# Altium PCB Copy of PDC.PcbDoc (part 2 of 2)
Units mm, origin at the board's own origin, x right, y up, seen from the top; angles counter-clockwise.
Board outline 131.87 x 127.02 mm, 2 copper layers (Top Layer, Bottom Layer); 172 components, 174 nets, 834 pads, 15 vias.
Unrouted connection lines stored in the file: 429.
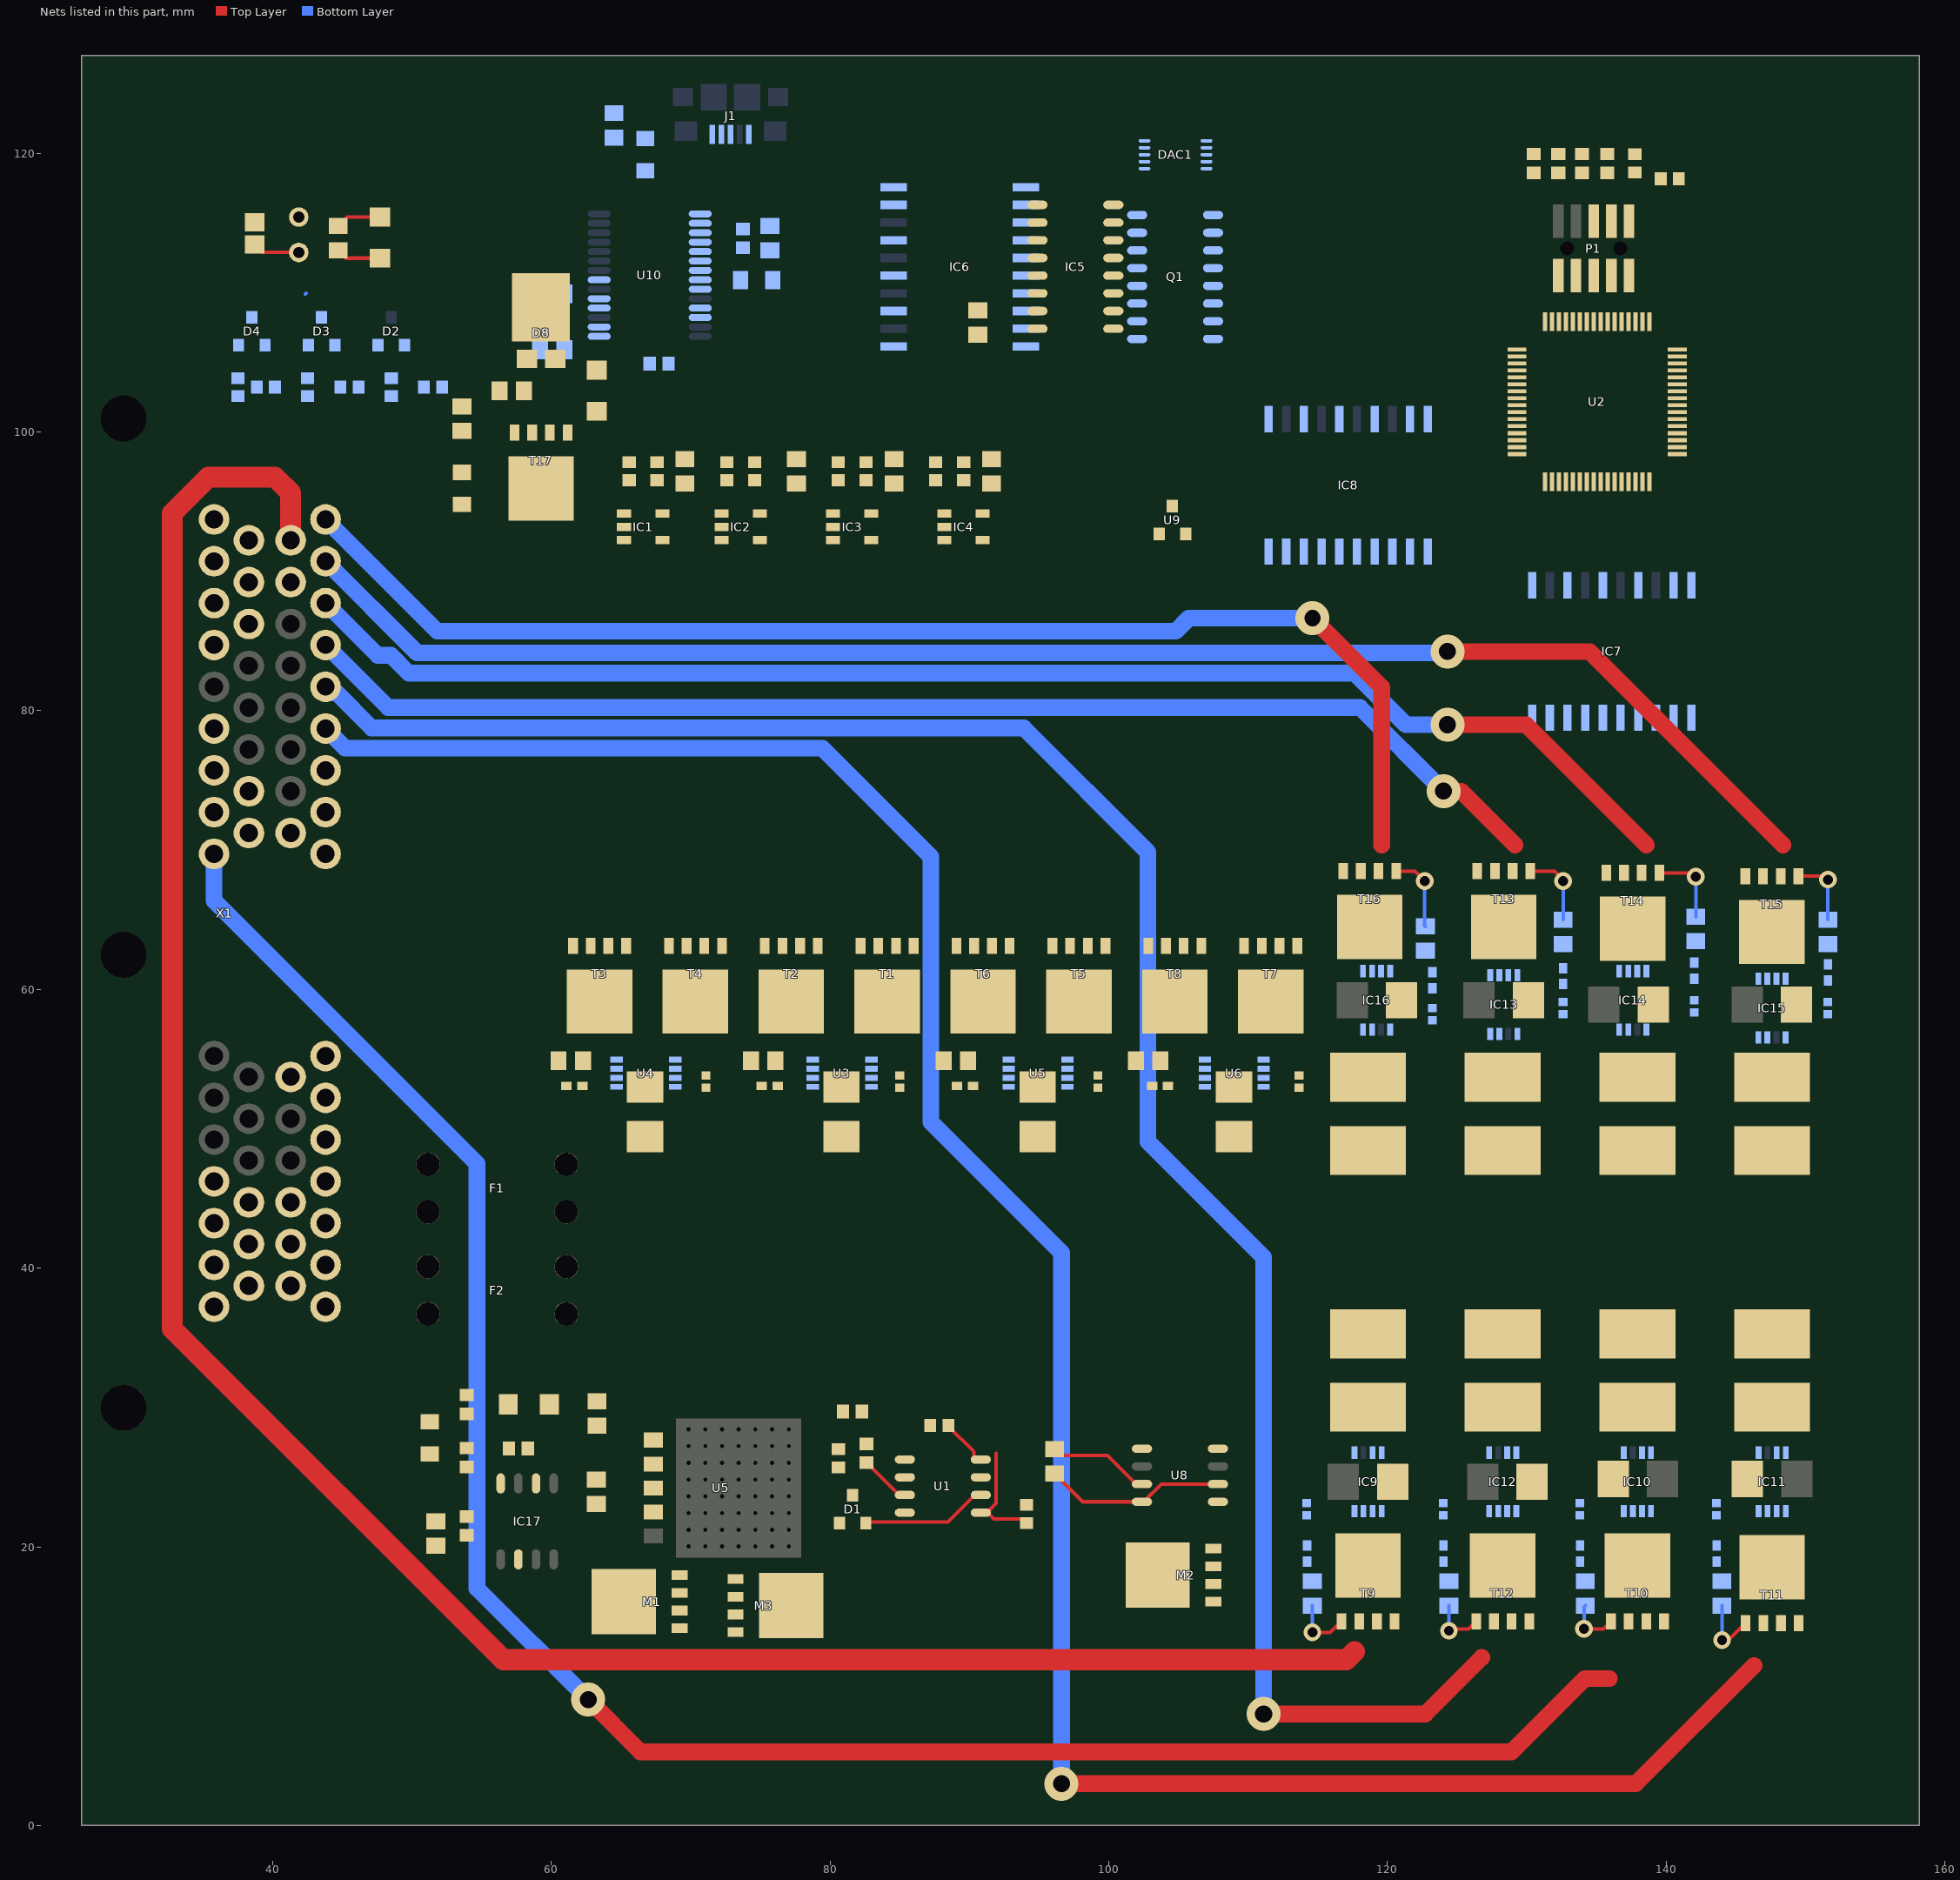
[diagram p2: the nets of this part, all layers, seen from the top]

## Part data
C1: library part 943, Dielectric=Ceramic, Manufacturer_id=1, Package="CAP 0603/1608", Voltage_Rating=50V, Created_By="Nick Mah", Created_Date=10/20/2018, Drawer_id=1, idCapacitor=943, Name="Cap_0.10uf_50V_CAP 0603/1608"
C2: library part 929, Dielectric=Ceramic, Manufacturer_id=1, Package="CAP 0603/1608", Voltage_Rating=50V, Created_By="Nick Mah", Created_Date=10/20/2018, Drawer_id=1, idCapacitor=929, Name="Cap_4700pf_50V_CAP 0603/1608"
C3: library part 223, Dielectric=Ceramic, Manufacturer_id=1, Package="CAP 0603/1608", Voltage_Rating=16V, Created_By="Nick Mah", Created_Date=10/20/2018, Drawer_id=1, idCapacitor=223, Name="Cap_0.10uf_16V_CAP 0603/1608"
C4 C6 C24 C25 C26: library part 583, Dielectric=Ceramic, Manufacturer_id=1, Package="CAP 0603/1608", Voltage_Rating=25V, Created_By="Nick Mah", Created_Date=10/20/2018, Drawer_id=1, idCapacitor=583, Name="Cap_0.10uf_25V_CAP 0603/1608"
C5: library part 529, Dielectric=Ceramic, Manufacturer_id=1, Package="CAP 0603/1608", Voltage_Rating=25V, Created_By="Nick Mah", Created_Date=10/20/2018, Drawer_id=1, idCapacitor=529, Name="Cap_100pf_25V_CAP 0603/1608"
C7 C8 C9 C10 C11 C12 C13 C14 C15 C16 C17 C18: library part 57, Dielectric=Ceramic, Manufacturer_id=1, Package="CAP 0402/1005", Voltage_Rating=16V, Created_By="Nick Mah", Created_Date=10/20/2018, Drawer_id=1, idCapacitor=57, Name="Cap_220pf_16V_CAP 0402/1005"
C19 C20: library part 235, Dielectric=Ceramic, Manufacturer_id=1, Package="CAP 0603/1608", Voltage_Rating=16V, Created_By="Nick Mah", Created_Date=10/20/2018, Drawer_id=1, idCapacitor=235, Name="Cap_10uf_16V_CAP 0603/1608"
C21 C22: library part 231, Dielectric=Ceramic, Manufacturer_id=1, Package="CAP 0603/1608", Voltage_Rating=16V, Created_By="Nick Mah", Created_Date=10/20/2018, Drawer_id=1, idCapacitor=231, Name="Cap_2.2uf_16V_CAP 0603/1608"
C23: library part 689, Dielectric=Ceramic, Manufacturer_id=1, Package="CAP 0805/2012", Voltage_Rating=25V, Created_By="Nick Mah", Created_Date=10/20/2018, Drawer_id=1, idCapacitor=689, Name="Cap_4700pf_25V_CAP 0805/2012"
D1: library part 7, "ESD Protection Diode", Manufacturer_id=1, Package=SOT-23, Power=350W, Supplier1PartNo=NUP1105LT1GOSCT-ND, ComponentLink1URL=https://www.digikey.com/product-detail/en/on-semiconductor/NUP1105LT1G/NUP1105LT1GOSCT-ND/2122067, Drawer_id=1, Ic=8A, idDiode=7, Link=https://www.digikey.com/product-detail/en/on-semiconductor/NUP1105LT1G/NUP1105LT1GOSCT-ND/2122067, MfrPartNo=NUP1105LT1G, Name=SOT-23_350W_Zener, Num_Circuits=1, Supplier1=Digikey, Type=Zener
D2 D3 D4: library part 14, "DIODE ZENER ARRAY 4.7V SOT23-3", Manufacturer_id=1, MfrPartNo=AZ23C4V7-7-F, Package=SOT23-3, Power=300mW, Created_By="Angel Delgado", Drawer_id=1, idDiode=14, Link=https://www.digikey.com/product-detail/en/diodes-incorporated/AZ23C4V7-7-F/AZ23C4V7-FDICT-ND/815309, Name=AZ23C4V7-7-F, Num_Circuits=2, Supplier1=Digi-Key, Type="Zener Array"
D5: library part 2, "Diode Super Barrier 40V 1A Surface Mount SOD-123F", Manufacturer_id=1, MfrPartNo=1N5819HW1-7-F, Package=SOD-123, Power=40V, Supplier1PartNo=1N5819HW1-7-FDITR-ND, ComponentLink1Description=Datasheet, ComponentLink1URL=https://www.diodes.com/assets/Datasheets/1N5819HW1.pdf, Drawer_id=1, Ic=1A, idDiode=2, Link=https://www.digikey.com/product-detail/en/diodes-incorporated/1N5819HW1-7-F/1N5819HW1-7-FDITR-ND/5768523, Name=1N5819, Num_Circuits=1, Supplier1=Digi-Key, Type="Super Barrier"
D6: library part 4, "100V Reverse DC Voltage", Manufacturer_id=1, MfrPartNo=1N4148W-7-F, Package=SOD123, Drawer_id=1, Ic="300 mA", idDiode=4, Link=https://www.digikey.com/product-detail/en/diodes-incorporated/1N4148W-7-F/1N4148W-FDICT-ND/815280, Name=1N4148W-7-F
D7: library part 10, "Zener Diode 14V 500mW ±5% Surface Mount SOD-123", Manufacturer_id=8, Package=SOD-123, Power=500mW, Supplier1PartNo=DDZ9701-7DICT-ND, ComponentLink1Description=Datasheet, ComponentLink1URL=https://www.diodes.com/assets/Datasheets/ds30410.pdf, Drawer_id=1, idDiode=10, Link=https://www.digikey.com/product-detail/en/diodes-incorporated/DDZ9701-7/DDZ9701-7DICT-ND/3877402, MfrPartNo=DDZ9701-7, Name=DDZ9701, Num_Circuits=1, Supplier1=Digi-Key, Type=Zener
D8: library part 11, Manufacturer_id=1, MfrPartNo=FSV20100V, Package=TO-277, Supplier1PartNo=FSV20100VCT-ND, ComponentLink1Description=Datasheet, ComponentLink1URL=https://www.fairchildsemi.com/datasheets/FS/FSV20100V.pdf, Drawer_id=1, idDiode=11, Link=https://www.digikey.com/product-detail/en/on-semiconductor/FSV20100V/FSV20100VCT-ND/5306682, Name=FSV20100V, Type=Schottky
D9 LED2: library part 2, Manufacturer_id=1, Package=0805, Brightness=7mcd, Drawer_id=1, Id=20mA, idLED=2, Link=https://www.digikey.com/product-detail/en/visual-communications-company-vcc/CMD17-21VGD-TR8/L62505CT-ND/254936, Name=CMD17_0805_GREEN, Vf=2.1V
D10: library part 1, Package=0805, Drawer_id=1, idLED=1, Manufacturer_id=1, Name=LED_0805_RED, Vf=0.7V
DAC1: library part 25, "10bit 4 channel DAC", Manufacturer_id=1, MfrPartNo=AD5314ARMZ, Package=MSOP-10, Drawer_id=1, idFuse=3, idIC_Misc=25, Link=https://www.digikey.com/product-detail/en/analog-devices-inc/AD5314ARMZ/AD5314ARMZ-ND/653841, Name=AD5314ARMZ, Num_Circuits=4, Type=DAC, Vin(Max)=5.5, Vin(Min)=2.5
F1 F2 U10: library part 3, Manufacturer_id=1, Drawer_id=1
  F1 F2: idFuse=3, Name="3568 Mini Fuse Holder"
  U10: Created_By=Kyle, idIC_Interface=3, Link=https://www.digikey.com/product-detail/en/ftdi-future-technology-devices-international-ltd/FT232RL-REEL/768-1007-1-ND/1836402, MfrPartNo=FT232RL, Name="USB FTDI", Protocol=UART, Vin(Max)=5.25, Vin(Min)=3.3
IC1 IC2 IC3 IC4: library part 4, Manufacturer_id=1, MfrPartNo=LT1716IS5#PBF, Drawer_id=1, idOp_Amp=4, Name="Op-Amp LT1716", Num_Circuits=1
IC5: library part 20, idIC_Misc=20
IC6 IC7 IC8: library part 16, Manufacturer_id=1, Created_By="Eunice Bernardo", Created_Date=10/27/2018, Drawer_id=1, idIC_Misc=16, Name="LT1161ISWPBF MOSFET Driver"
IC9 IC10 IC11 IC12 IC13 IC14 IC15 IC16 U3 U4 U5 U6: library part 13, Manufacturer_id=1, Package=MS8, Created_By=Eddy, Created_Date=10/17/2018, Drawer_id=1, idIC_Misc=13, Name="LT6100 Current Sense Amp"
IC17: library part 10, "IC VREF SERIES 5V 8SOIC", Manufacturer_id=1, MfrPartNo=MAX6350CSA+, Package=SOIC-8, Created_By="Albert Panuco", Drawer_id=1, idPMIC_Lin=10, Link=https://www.digikey.com/product-detail/en/maxim-integrated/MAX6350CSA/MAX6350CSA-ND/1867176, Name=MAX6350CSA+_5V_Ref, Num_Outputs=1, Output_Config=5V, Updated_By="Albert Panuco", Vin(Max)=40V, Vout(Max)=12V
J1: library part 5, "USB Micro Type B", Manufacturer_id=1, ComponentLink1Description=Datasheet, Created_By=Aiku, Created_Date=10/20/2018, Drawer_id=1, idConn=5, Link=https://www.mouser.com/ProductDetail/TE-Connectivity-AMP/1981568-1?qs=sGAEpiMZZMulM8LPOQ%252bykzEIUPbUCiSfqsfxH3Oq%252bYo%3d, MfrPartNo=1981568-1, Name="TE USB Micro", Num_Contacts=5, Supplier1=TE
LED1: library part 2, Manufacturer_id=1, Brightness=35mcd, Drawer_id=1, Id=20mA, idLED=2, Name=LED_0805_GREEN, Vf=2V
M1 M2 M3 T1 T2 T3 T4 T5 T6 T7 T8 T9 T10 T11 T12 T13 T14 T15 T16 T17: library part 3, "N-Channel 25V 100A (Tc) 106W (Tc) Surface Mount LFPAK56, Power-SO8", Manufacturer_id=6, MfrPartNo=PSMN2R2-25YLC,115, Package=LFPAK-SO8, Supplier1PartNo=1727-5299-1-ND, ComponentLink1Description=Datasheet, ComponentLink1URL=https://assets.nexperia.com/documents/data-sheet/PSMN2R2-25YLC.pdf, Created_By=Nick, Drawer_id=1, Id=100A, idFETs=3, Link=https://www.digikey.com/product-detail/en/nexperia-usa-inc/PSMN2R2-25YLC115/1727-5299-1-ND/2674299, Name=PSMN2R2, Num_Circuits=1, Rds_On=2.5mOhm, Supplier1=Digi-Key, Vdss=25V, Vgs(Max)=20V, Vgs(typ)=10V
P1: library part 4, "2 row connector", Manufacturer_id=1, Voltage_Rating=None, ComponentLink1Description=Datasheet, Created_By=Aiku, Drawer_id=1, idConn=4, Link=https://www.digikey.com/product-detail/en/5103309-1/A33160-ND/1114898?utm_campaign=buynow&WT.z_cid=ref_octopart_dkc_buynow&utm_medium=aggregator&curr=usd&site=us&utm_source=octopart, MfrPartNo=5103309-1, Name=CONN_TE_2X5POS, Num_Contacts=10, Num_Rows=2, Pitch=2.54mm
"PTC Fuse1" "PTC Fuse2" "PTC Fuse3" "PTC Fuse4" "PTC Fuse5" "PTC Fuse6" "PTC Fuse7" "PTC Fuse8": library part 6, "Fuse", Manufacturer_id=1, MfrPartNo=2920L500/16MR, Created_By=Angel, Drawer_id=1, I_hold="5 A", I_max="40 A", I_trip="10 A", idFuse=6, LatestRevisionDate=17-Jul-2002, LatestRevisionNote="Re-released for DXP Platform.", Link=https://www.digikey.com/product-detail/en/littelfuse-inc/2920L500-16MR/F6136CT-ND/4147146, Name=2920L500/16MR, PackageDescription="Thru-Hole; 2 Leads", PackageReference=PIN-W2/E2.8, Published=8-Jun-2000, Publisher="Altium Limited", V_max="16 V"
Q1: library part 5, Manufacturer_id=1, Package=SOIC-16, Created_By="Angel Delgado", Drawer_id=1, hFE=75, Ic=200mA, idBJT=5, Link=https://www.mouser.com/ProductDetail/ON-Semiconductor-Fairchild/MMPQ3904?qs=sGAEpiMZZMshyDBzk1%2fWi8oN7VHZ91OkACYhS8H8agM%3d, MfrPartNo=MMPQ3904, Name=MMPQ3904, Num_Circuits=4, Type="NPN Array", Vce(Max)=40V
R1 R4 R7 R10 R23: library part 313, Manufacturer_id=1, Package=0603, Power=1/10W, Tolerance=1%, ComponentLink1Description=Datasheet, Created_By="Nick Mah", Created_Date=2018-10-20, Drawer_id=1, idResistor=313, Name=Res_10k_0603_1/10W_1%, Supplier 1=Digi-Key
R2 R5 R8 R11 R16: library part 529, Manufacturer_id=1, Package=0805, Power=1/10W, Tolerance=1%, ComponentLink1Description=Datasheet, Created_By="Nick Mah", Created_Date=2018-10-20, Drawer_id=1, idResistor=529, Name=Res_10k_0805_1/10W_1%, Supplier 1=Digi-Key
R3 R6 R9 R12: library part 300, Manufacturer_id=1, Package=0603, Power=1/10W, Tolerance=1%, ComponentLink1Description=Datasheet, Created_By="Nick Mah", Created_Date=2018-10-20, Drawer_id=1, idResistor=300, Name=Res_3.0k_0603_1/10W_1%, Supplier 1=Digi-Key
R13 R14: library part 1340, Manufacturer_id=1, Package=0603, Power=1/10W, Tolerance=5%, ComponentLink1Description=Datasheet, Created_By="Nick Mah", Created_Date=2018-10-20, Drawer_id=1, idResistor=1340, Name=Res_62_0603_1/10W_5%, Supplier 1=Digi-Key
R15: library part 2293, Manufacturer_id=1, Package=0603, Power=1/10W, Tolerance=10%, ComponentLink1Description=Datasheet, Created_By="Nick Mah", Created_Date=2018-10-20, Drawer_id=1, idResistor=2293, Name=Res_100_0603_1/10W_10%, Supplier 1=Digi-Key
R17 R18 R19 R20 R21 R22: library part 297, Manufacturer_id=1, Package=0603, Power=1/10W, Tolerance=1%, ComponentLink1Description=Datasheet, Created_By="Nick Mah", Created_Date=2018-10-20, Drawer_id=1, idResistor=297, Name=Res_2.2k_0603_1/10W_1%, Supplier 1=Digi-Key
R24: library part 1393, Manufacturer_id=1, Package=0603, Power=1/10W, Tolerance=5%, ComponentLink1Description=Datasheet, Created_By="Nick Mah", Created_Date=2018-10-20, Drawer_id=1, idResistor=1393, Name=Res_10k_0603_1/10W_5%, Supplier 1=Digi-Key
R25 R28 R31 R34: library part 2702, "Current Sense Resistor", Manufacturer_id=1, MfrPartNo=CSNL2010FT2L00, Package=2010, Power=1.5W, Supplier Part Number 1=Digi-Key, Tolerance=1%, ComponentLink1Description=Datasheet, Created_By=Angel, Drawer_id=1, idResistor=2702, Link=https://www.digikey.com/product-detail/en/stackpole-electronics-inc/CSNL2010FT2L00/CSNL2010FT2L00CT-ND/1788126, Name=Res_.002_2010_1.5W_1%, Supplier 1=Digi-Key
R26 R29 R32 R35 R38 R41 R44 R47 R50 R53 R56 R59: library part 2430, Manufacturer_id=1, Package=0805, Power=1/10W, Tolerance=10%, ComponentLink1Description=Datasheet, Created_By="Nick Mah", Created_Date=2018-10-20, Drawer_id=1, idResistor=2430, Name=Res_27k_0805_1/10W_10%, Supplier 1=Digi-Key
R27 R30 R33 R36 R39 R42 R45 R48 R51 R54 R57 R60: library part 97, Manufacturer_id=1, Package=0402, Power=1/10W, Tolerance=1%, ComponentLink1Description=Datasheet, Created_By="Nick Mah", Created_Date=2018-10-20, Drawer_id=1, idResistor=97, Name=Res_10k_0402_1/10W_1%, Supplier 1=Digi-Key
R37 R40 R43 R46 R49 R52 R55 R58: library part 2701, "Current Sense Resistor", Manufacturer_id=1, MfrPartNo=CSRN2010FK20L0, Package=2010, Power=1W, Supplier Part Number 1=Digi-Key, Tolerance=1%, ComponentLink1Description=Datasheet, Created_By=Angel, Drawer_id=1, idResistor=2701, Link=https://www.digikey.com/product-detail/en/stackpole-electronics-inc/CSRN2010FK20L0/CSRN2010FK20L0TR-ND/1646098, Name=Res_.02_2010_1W_1%, Supplier 1=Digi-Key
R61: library part 2432, Manufacturer_id=1, Package=0805, Power=1/10W, Tolerance=10%, ComponentLink1Description=Datasheet, Created_By="Nick Mah", Created_Date=2018-10-20, Drawer_id=1, idResistor=2432, Name=Res_39k_0805_1/10W_10%, Supplier 1=Digi-Key
R62: library part 2533, Manufacturer_id=1, Package=0805, Power=1/4W, Tolerance=10%, ComponentLink1Description=Datasheet, Created_By="Nick Mah", Created_Date=2018-10-20, Drawer_id=1, idResistor=2533, Name=Res_10k_0805_1/4W_10%, Supplier 1=Digi-Key
R63: library part 2413, Manufacturer_id=1, Package=0805, Power=1/10W, Tolerance=10%, ComponentLink1Description=Datasheet, Created_By="Nick Mah", Created_Date=2018-10-20, Drawer_id=1, idResistor=2413, Name=Res_1.0k_0805_1/10W_10%, Supplier 1=Digi-Key
R64: library part 2703, Manufacturer_id=1, Package=0805, Power=1/10W, Supplier Part Number 1=Digi-Key, Tolerance=0.5%, ComponentLink1Description=Datasheet, Drawer_id=1, idResistor=2703, Link=https://www.digikey.com/product-detail/en/susumu/RR1220P-1472-D-M/RR12P14.7KDCT-ND/1288245, Name=Res_14.7K_0805_1/10W_0.5%
R65: library part 553, Manufacturer_id=1, Package=0805, Power=1/10W, Tolerance=1%, ComponentLink1Description=Datasheet, Created_By="Nick Mah", Created_Date=2018-10-20, Drawer_id=1, idResistor=553, Name=Res_100k_0805_1/10W_1%, Supplier 1=Digi-Key
R66: library part 545, Manufacturer_id=1, Package=0805, Power=1/10W, Tolerance=1%, ComponentLink1Description=Datasheet, Created_By="Nick Mah", Created_Date=2018-10-20, Drawer_id=1, idResistor=545, Name=Res_47k_0805_1/10W_1%, Supplier 1=Digi-Key
R67: library part 497, Manufacturer_id=1, Package=0805, Power=1/10W, Tolerance=1%, ComponentLink1Description=Datasheet, Created_By="Nick Mah", Created_Date=2018-10-20, Drawer_id=1, idResistor=497, Name=Res_470_0805_1/10W_1%, Supplier 1=Digi-Key
R68 R69 R70 R71: library part 721, Manufacturer_id=1, Package=0805, Power=1/4W, Tolerance=1%, ComponentLink1Description=Datasheet, Created_By="Nick Mah", Created_Date=2018-10-20, Drawer_id=1, idResistor=721, Name=Res_1.0k_0805_1/4W_1%, Supplier 1=Digi-Key
U1: library part 5, Manufacturer_id=1, MfrPartNo=MCP2561, Package=SOIC-8, Created_By="Angel Delgado", Data_Rate=1Mbps, Drawer_id=1, idIC_Interface=5, Link=https://www.digikey.com/product-detail/en/microchip-technology/MCP2561T-E-SN/MCP2561T-E-SNCT-ND/5148846, Name="CAN Transceiver", Num_Circuits=1, Protocol=CAN, Type=Transceiver, Vin(Max)=5.5V, Vin(Min)=4.5V
U2: library part 1, Drawer_id=1, idMCU=1, Manufacturer_id=1, Name="MKE18F512VLH16 MCU"
U5: library part 6, Current_Rating=2A, Dropout_Voltage=0.7V, Manufacturer_id=1, MfrPartNo=BA50DD0WHFP-TR, Drawer_id=1, idPMIC_Lin=6, Link=https://www.mouser.com/ProductDetail/ROHM-Semiconductor/BA50DD0WHFP-TR?qs=4kLU8WoGk0sFpKnESpdNFg%3D%3D, Name="BA50DD0WHFP-TR Linear Voltage Regulator 5", Vin(Max)=33V, Vin(Min)=3V, Vout(Max)=5V
U8: library part 18, "Protected High Side MOSFET Driver", Manufacturer_id=1, Drawer_id=1, idIC_Misc=18, Name="LT1910 MOSFET Driver"
U9: library part 23, Manufacturer_id=1, MfrPartNo=MCP9701T-E/TT, Package=SOT23-3, Drawer_id=1, idFuse=3, idIC_Misc=23, Link=https://www.digikey.com/product-detail/en/microchip-technology/MCP9701T-E-TT/MCP9701T-E-TTCT-ND/1987446, Name=MCP970x, Vin(Max)=5.5V, Vin(Min)=3.1V
W1: library part 18, "Jumper headers", Manufacturer_id=1, MfrPartNo=XG8T-0231, ComponentLink1Description=Datasheet, Drawer_id=1, idConn=18, idFuse=3, Link=https://www.digikey.ca/product-detail/en/omron-electronics-inc-emc-div/XG8T-0231/XG8T-0231-ND/1829453, Name=XG8T-0231, Num_Contacts=2, Num_Rows=1, Pitch=".1 mm", Supplier1=Digi-Key
X1: library part 3, "90 Degree", Manufacturer_id=1, ComponentLink1Description=Datasheet, Drawer_id=1, idConn=3, Link=https://www.te.com/usa-en/product-3-6437285-2.html, MfrPartNo=3-6437285-2, Name="AMP Superseal 60POS 90Deg", Num_Contacts=60, Num_Rows=4, Pitch="3 mm"

## Via types
v1: diameter 1.27, hole 0.711, Top Layer to Bottom Layer, 8 vias
v2: diameter 2.438, hole 1.219, Top Layer to Bottom Layer, 6 vias
v3: diameter 2.438, hole 1.168, Top Layer to Bottom Layer, 1 vias

## Nets (pads, with @x,y where several pads share a name; then routed paths per layer and width w, separated by ;. In a path a pad name is that pad's centre, name@x,y a point inside that pad or via, vN(x,y) a via of type N, cw(c..) or ccw(c..) an arc to the next point about the centre after c; other vN are vias at no path point)
5VREF: C6.2 C22.2 IC17.6 U2.7
+5: C4.2 C19.2 D6.2 DAC1.1 DAC1.5 IC1.5 IC2.5 IC3.5 IC4.5 IC9.2 IC10.2 IC11.2 IC12.2 IC13.2 IC14.2 IC15.2 IC16.2 R16.2 R63.1 R65.2 U2.8 U2.9 U3.2 U4.2 U5.2 U5.4@67.323,22.502 U6.2 U9.1 | length 3.3
  Top Layer w0.254: R65.2@44.7,114.779 45.35,115.429 D6.2@47.7,115.429
+12: "PTC Fuse1.2" "PTC Fuse2.2" "PTC Fuse3.2" "PTC Fuse4.2" "PTC Fuse5.2" "PTC Fuse6.2" "PTC Fuse7.2" "PTC Fuse8.2" C21.2 D5.1 D7.2 D8.3 F1.1 F2.1 IC6.11 IC6.13 IC6.15 IC6.17 IC6.19 IC6.20 IC7.11 IC7.13 IC7.15 IC7.17 IC7.19 IC7.20 IC8.11 IC8.13 IC8.15 IC8.17 IC8.19 IC8.20 IC17.2 LED2.1 R25.2 R28.2 R31.2 R34.2 R61.2 R64.1 T17.mb U3.8 U4.8 U5.8 U6.8 U8.4 U8.6 U8.8 | length 13.1
  Top Layer w0.254: R64.1@96.117,25.261 98.147,23.231 U8.4@102.392,23.231 102.51,23.231 103.78,24.501 U8.6@107.842,24.501
BAT_SENSE: R61.1 R62.2 U2.3
CAN_N: D1.2 R13.1 U1.6 X1.A25 | length 9.1
  Top Layer w0.254: D1.2@82.577,21.706 82.641,21.77 88.451,21.77 90.402,23.721 U1.6@90.827,23.721
CAN_P: D1.1 R14.2 U1.7 X1.A24
CS: DAC1.10 U2.34
D_IN_1: R18.2 X1.A33
D_IN_2: R20.2 X1.A32
D_IN_3: R17.2 X1.A31
D_N: J1.2 U10.16
D_OUT_1: D2.1 R22.1 U2.57
D_OUT_2: D2.2 R19.1 U2.59
D_OUT_3: D3.1 R21.1 U2.60
D_OUT_4: D3.2 R18.1 | length 0.1
  Bottom Layer w0.254: 42.35,109.917 42.4,109.967
D_OUT_5: D4.1 R20.1
D_OUT_6: D4.2 R17.1
D_P: J1.3 U10.15
DGND: C1.1 C2.1 C3.1 C4.1 C5.1 C6.1 C7.1 C8.1 C9.1 C10.1 C11.1 C12.1 C13.1 C14.1 C15.1 C16.1 C17.1 C18.1 C19.1 C20.1 C21.1 C22.1 C23.1 C25.1 C26.1 D1.3 D3.3 D4.3 D8.1 D8.2 DAC1.7 IC1.2 IC2.2 IC3.2 IC4.2 IC6.1 IC6.10 IC7.1 IC7.10 IC8.1 IC8.10 IC9.4 IC9.7 IC10.4 IC10.7 IC11.4 IC11.7 IC12.4 IC12.7 IC13.4 IC13.7 IC14.4 IC14.7 IC15.4 IC15.7 IC16.4 IC16.7 IC17.4 J1.5 LED1.2 P1.3 P1.5 Q1.10 Q1.12 Q1.14 Q1.16 R15.1 R27.1 R30.1 R33.1 R36.1 R39.1 R42.1 R45.1 R48.1 R51.1 R54.1 R57.1 R60.1 R62.1 R66.1 R67.1 T17.1 T17.2 T17.3 U1.2 U2.10 U2.40 U3.4 U3.6 U3.7 U4.4 U4.6 U4.7 U5.3@67.323,24.222 U5.4@97.046,53.008 U5.6@92.835,53.658 U5.7 U6.4 U6.6 U6.7 U8.1 U9.3 U10.7 U10.18 U10.21 U10.25 U10.26 W1.1 X1.B17 X1.B18 X1.B19 X1.B23 X1.B24 X1.B25 X1.B26 | length 0
  Top Layer w0.254: T17.3@58.508,99.696 T17.3@58.508,99.735
DVCC: C3.2 C5.2 C25.2 P1.1 R23.2 R24.2 U2.41 U10.4 U10.19 U10.20
DVCC_5V: J1.1 R70.2 R71.2
EMERGENCY_SHUTDOWN: IC5.9 IC5.11 IC5.13 IC5.15 R16.1 X1.A20
FTDI_GREEN: D9.2 U10.23
FTDI_RED: D10.2 U10.22
FTDI_RX: R69.2 U2.47
FTDI_TX: R68.2 U2.48
HC1_ANALOG_BACKUP_REF: DAC1.2 IC4.4
HC1_EN: IC5.16 U2.24
HC1_GATE: IC6.18 Q1.1 Q1.2 T7.4 T8.4
HC1_ISENSE_ADC: R12.1 U2.46 U6.5
HC1_VSENSE_ADC: R35.1 R36.2 U2.43
HC2_ANALOG_BACKUP_REF: DAC1.3 IC3.4
HC2_EN: IC5.14 U2.23
HC2_GATE: IC6.16 Q1.3 Q1.4 T5.4 T6.4
HC2_ISENSE_ADC: R9.1 U2.52 U5.5@92.835,53.008
HC2_VSENSE_ADC: R32.1 R33.2 U2.42
HC3_ANALOG_BACKUP_REF: DAC1.4 IC2.4
HC3_EN: IC5.12 U2.22
HC3_GATE: IC6.14 Q1.5 Q1.6 T3.4 T4.4
HC3_ISENSE_ADC: R6.1 U2.51 U4.5
HC3_VSENSE_ADC: R29.1 R30.2 U2.55
HC4_ANALOG_BACKUP_REF: DAC1.6 IC1.4
HC4_EN: IC5.10 U2.19
HC4_GATE: IC6.12 Q1.7 Q1.8 T1.4 T2.4
HC4_ISENSE_ADC: R3.1 U2.45 U3.5
HC4_VSENSE_ADC: R26.1 R27.2 U2.56
HC_1_OUTPUT: R35.2 T7.1 T7.2 T7.3 T8.1 T8.2 T8.3 X1.A7 X1.A8
HC_2_OUTPUT: R32.2 T5.1 T5.2 T5.3 T6.1 T6.2 T6.3 X1.A9 X1.A17
HC_3_OUTPUT: R29.2 T3.1 T3.2 T3.3 T4.1 T4.2 T4.3 X1.B2 X1.B3
HC_4_OUTPUT: R26.2 T1.1 T1.2 T1.3 T2.1 T2.2 T2.3 X1.B1 X1.B8
JTAG_RST: C23.2 C24.2 D6.1 P1.10 R24.1 R65.1 U2.63 W1.2 | length 6.6
  Top Layer w0.254: C23.2@38.7,113.454 39.265,112.889 W1.2@41.875,112.889 ; R65.1@44.7,113.029 45.25,112.479 D6.1@47.7,112.479
JTAG_TCLK: P1.4 U2.62
JTAG_TDI: P1.8 U2.61
JTAG_TDO: P1.6 U2.58
JTAG_TMS: P1.2 R23.1 U2.64
LC1_EN: IC8.3 U2.16
LC1_GATE: IC8.18 T16.4
LC2_EN: IC8.5 U2.15
LC2_GATE: IC8.16 T15.4
LC3_EN: IC8.7 U2.14
LC3_GATE: IC8.14 T14.4
LC4_EN: IC8.9 U2.13
LC4_GATE: IC8.12 T13.4
LC5_EN: IC7.3 U2.12
LC5_GATE: IC7.18 T12.4
LC6_EN: IC7.5 U2.11
LC6_GATE: IC7.16 T11.4
LC7_EN: IC7.7 U2.2
LC7_GATE: IC7.14 T10.4
LC8_EN: IC7.9 U2.1
LC8_GATE: IC7.12 T9.4
LC_1_ISENSE_ADC: IC16.5 U2.49
LC_1_OUTPUT: R59.2 T16.1 T16.2 T16.3 X1.A1 | length 98.5
  Top Layer w0.254: T16.1@120.636,68.482 121.981,68.482 v1(122.681,67.783)
  Top Layer w1.2: v3(114.629,86.65) 119.591,81.688 119.591,70.374
  Bottom Layer w0.254: v1(122.681,67.783) 122.681,64.582 R59.2@122.731,64.532
  Bottom Layer w1.2: X1.A1@43.801,93.726 51.823,85.704 104.809,85.704 105.755,86.65 v3(114.629,86.65)
LC_1_VSENSE_ADC: R59.1 R60.2 U2.25
LC_2_ISENSE_ADC: IC15.5 U2.38
LC_2_OUTPUT: R56.2 T15.1 T15.2 T15.3 X1.A2 | length 118.2
  Top Layer w0.254: T15.1@149.506,68.133 151.366,68.133 v1(151.616,67.883)
  Top Layer w1.2: v2(124.314,84.25) 134.525,84.25 148.401,70.374
  Bottom Layer w0.254: R56.2@151.616,65.008 v1(151.616,67.883)
  Bottom Layer w1.2: X1.A2@43.801,90.726 50.374,84.153 124.217,84.153 v2(124.314,84.25)
LC_2_VSENSE_ADC: R56.1 R57.2 U2.21
LC_3_ISENSE_ADC: IC14.5 U2.37
LC_3_OUTPUT: R53.2 T14.1 T14.2 T14.3 X1.A3 | length 107.6
  Top Layer w0.254: T14.1@139.521,68.358 141.866,68.358 v1(142.141,68.082)
  Top Layer w1.2: v2(124.314,79) 129.965,79 138.591,70.374
  Bottom Layer w0.254: R53.2@142.141,65.217 v1(142.141,68.082)
  Bottom Layer w1.2: X1.A3@43.801,87.726 47.551,83.976 48.495,83.976 49.772,82.699 117.624,82.699 121.323,79 v2(124.314,79)
LC_3_VSENSE_ADC: R53.1 R54.2 U2.20
LC_4_ISENSE_ADC: IC13.5 U2.54
LC_4_OUTPUT: R50.2 T13.1 T13.2 T13.3 X1.A4 | length 96.8
  Top Layer w0.254: T13.1@130.264,68.482 132.016,68.482 132.616,67.883 v1(132.616,67.783)
  Top Layer w1.2: v2(124.041,74.226) 125.307,74.226 129.159,70.374
  Bottom Layer w0.254: R50.2@132.616,65.008 v1(132.616,67.783)
  Bottom Layer w1.2: X1.A4@43.801,84.726 48.301,80.226 118.041,80.226 v2(124.041,74.226)
LC_4_VSENSE_ADC: R50.1 R51.2 U2.30
LC_5_ISENSE_ADC: IC12.5 U2.36
LC_5_OUTPUT: R47.2 T12.1 T12.2 T12.3 X1.A5 | length 151.5
  Top Layer w0.25: v1(124.422,13.976) 124.778,13.976 124.916,14.113 125.833,14.113 T12.1@126.377,14.658
  Top Layer w1.2: v2(111.121,8) 122.717,8 126.778,12.061
  Bottom Layer w0.25: R47.2@124.416,15.783 124.416,14.507 124.81,14.113 124.525,13.829 124.422,13.932 v1(124.422,13.976)
  Bottom Layer w1.2: X1.A5@43.801,81.726 43.801,81.272 44.607,81.272 47.108,78.772 93.903,78.772 102.823,69.852 102.823,49.071 111.121,40.774 v2(111.121,8)
LC_5_VSENSE_ADC: R47.1 R48.2 U2.29
LC_6_ISENSE_ADC: IC11.5 U2.53
LC_6_OUTPUT: R44.2 T11.1 T11.2 T11.3 X1.A6 | length 175.5
  Top Layer w0.254: v1(144.022,13.309) 144.487,13.309 T11.1@145.711,14.532
  Top Layer w1.2: v2(96.617,3) 137.833,3 146.315,11.482
  Bottom Layer w0.254: R44.2@144.016,15.783 144.022,15.777 v1(144.022,13.309)
  Bottom Layer w1.2: X1.A6@43.801,78.726 45.209,77.318 79.449,77.318 87.24,69.527 87.24,50.485 96.617,41.107 v2(96.617,3)
LC_6_VSENSE_ADC: R44.1 R45.2 U2.28
LC_7_ISENSE_ADC: IC10.5 U2.31
LC_7_OUTPUT: R41.2 T10.1 T10.2 T10.3 X1.A34 | length 152.7
  Top Layer w0.25: v1(134.116,14.113) 135.5,14.113 T10.1@136.044,14.658
  Top Layer w1.2: v2(62.65,9.036) 66.407,5.278 128.919,5.278 134.181,10.54 135.946,10.54
  Bottom Layer w0.25: v1(134.116,14.113) 134.116,15.683 R41.2@134.216,15.783
  Bottom Layer w1.2: X1.A34@35.801,69.726 35.801,66.375 54.671,47.505 54.671,17.014 v2(62.65,9.036)
LC_7_VSENSE_ADC: R41.1 R42.2 U2.27
LC_8_ISENSE_ADC: IC9.5 U2.26
LC_8_OUTPUT: R38.2 T9.1 T9.2 T9.3 X1.A10 | length 171.9
  Top Layer w0.25: v1(114.622,13.856) 115.909,13.856 T9.1@116.711,14.658 T9.1@116.711,14.429 ; T9.2@117.981,14.429 T9.2@117.981,14.658 ; T9.3@119.251,14.429 T9.3@119.251,14.658
  Top Layer w1.5: X1.A10@41.301,92.226 41.301,95.641 40.175,96.767 35.388,96.767 32.801,94.18 32.801,35.644 56.546,11.899 117.052,11.899 117.641,12.488
  Bottom Layer w0.25: R38.2@114.616,15.783 114.622,15.777 v1(114.622,13.856)
LC_8_VSENSE_ADC: R38.1 R39.2 U2.50
MOSI: DAC1.8 U2.33
NetC2_2: C2.2 R13.2 R14.1 U1.5 | length 8.1
  Top Layer w0.254: U1.5@90.827,22.451 U1.5@91.252,22.451 ; 91.933,26.714 91.933,23.132 U1.5@91.252,22.451 ; R13.2@94.102,21.706 93.804,22.004 91.768,22.004 91.321,22.451 U1.5@91.252,22.451
NetC7_2: C7.2 U3.3
NetC8_2: C8.2 U4.3
NetC9_2: C9.2 U5.3@97.046,53.658
NetC10_2: C10.2 U6.3
NetC11_2: C11.2 IC9.3
NetC12_2: C12.2 IC10.3
NetC13_2: C13.2 IC11.3
NetC14_2: C14.2 IC12.3
NetC15_2: C15.2 IC13.3
NetC16_2: C16.2 IC14.3
NetC17_2: C17.2 IC15.3
NetC18_2: C18.2 IC16.3
NetC20_2: C20.2 D5.2 U5.1@67.323,27.662
NetC24_1: C24.1 U10.2
NetD7_1: D7.1 R66.2 T17.4
NetD9_1: D9.1 R70.1
NetD10_1: D10.1 R71.1
NetF1_2: F1.2 F2.2 X1.B4 X1.B5 X1.B6 X1.B7 X1.B11 X1.B12 X1.B13
NetIC1_1: IC1.1 R1.2 R2.1
NetIC1_3: IC1.3 R1.1 R3.2
NetIC2_1: IC2.1 R4.2 R5.1
NetIC2_3: IC2.3 R4.1 R6.2
NetIC3_1: IC3.1 R7.2 R8.1
NetIC3_3: IC3.3 R7.1 R9.2
NetIC4_1: IC4.1 R10.2 R11.1
NetIC4_3: IC4.3 R10.1 R12.2
NetIC5_1: IC5.1 IC5.2 IC6.3
NetIC5_3: IC5.3 IC5.4 IC6.5
NetIC5_5: IC5.5 IC5.6 IC6.7
NetIC5_7: IC5.7 IC5.8 IC6.9
NetIC9_1: IC9.1 T9.mb
NetIC9_8: "PTC Fuse1.1" IC9.8 R37.2
NetIC10_1: IC10.1 T10.mb
NetIC10_8: "PTC Fuse2.1" IC10.8 R40.2
NetIC11_1: IC11.1 T11.mb
NetIC11_8: "PTC Fuse3.1" IC11.8 R43.2
NetIC12_1: IC12.1 T12.mb
NetIC12_8: "PTC Fuse4.1" IC12.8 R46.2
NetIC13_1: IC13.1 T13.mb
NetIC13_8: "PTC Fuse5.1" IC13.8 R49.2
NetIC14_1: IC14.1 T14.mb
NetIC14_8: "PTC Fuse6.1" IC14.8 R52.2
NetIC15_1: IC15.1 T15.mb
NetIC15_8: "PTC Fuse7.1" IC15.8 R55.2
NetIC16_1: IC16.1 T16.mb
NetIC16_8: "PTC Fuse8.1" IC16.8 R58.2
NetLED1_1: LED1.1 R63.2
NetLED2_2: LED2.2 R67.2
NetM1_4: M1.4 M2.4 M3.4 U8.5
NetQ1_9: Q1.9 R2.2
NetQ1_11: Q1.11 R5.2
NetQ1_13: Q1.13 R8.2
NetQ1_15: Q1.15 R11.2
NetR15_2: R15.2 U1.8 | length 3.6
  Top Layer w0.254: R15.2@88.502,28.706 88.502,28.656 90.336,26.822 90.336,26.421 90.496,26.261 U1.8@90.827,26.261
NetR25_1: R25.1 T1.mb T2.mb U3.1
NetR28_1: R28.1 T3.mb T4.mb U4.1
NetR31_1: R31.1 T5.mb T6.mb U5.1@97.046,54.958
NetR34_1: R34.1 T7.mb T8.mb U6.1
NetR64_2: R64.2 U8.3 | length 7.3
  Top Layer w0.254: R64.2@96.117,27.011 96.565,26.563 99.905,26.563 101.967,24.501 U8.3@102.392,24.501
NetR68_1: R68.1 U10.1
NetR69_1: R69.1 U10.5
NetU1_1: U1.1 U2.5
NetU1_4: U1.4 U2.6
NetU2_17: U2.17
NetU2_18: U2.18
NetU2_35: U2.35
NetU2_39: U2.39
NetU2_44: U2.44
RECTIFIER_IN: M1.mb M2.mb M3.mb X1.A28 X1.A29
RECTIFIER_OUT: M1.1 M1.2 M1.3 M2.1 M2.2 M2.3 M3.1 M3.2 M3.3 X1.A26 X1.A27
Relay_Sig_HC_1: R22.2 X1.A19
Relay_Sig_HC_2: R19.2 X1.A18
Relay_Sig_LC: R21.2 X1.A11
SCK: DAC1.9 U2.32
TEMP_SENSE: U2.4 U9.2
VCC: C1.2 U1.3 | length 3.7
  Top Layer w0.254: C1.2@82.611,26.031 82.66,26.031 84.971,23.721 U1.3@85.377,23.721
VCC_3V3: C26.2 U10.17
pads on no net: D2.3 IC6.2 IC6.4 IC6.6 IC6.8 IC7.2 IC7.4 IC7.6 IC7.8 IC8.2 IC8.4 IC8.6 IC8.8 IC9.6 IC10.6 IC11.6 IC12.6 IC13.6 IC14.6 IC15.6 IC16.6 IC17.1 IC17.3 IC17.5 IC17.7 IC17.8 J1.4 J1.6 J1.7 J1.8 J1.9 J1.10 J1.11 P1.7 P1.9 P1.MH1 P1.MH2 R37.1 R40.1 R43.1 R46.1 R49.1 R52.1 R55.1 R58.1 U5.5@67.323,20.782 U5.6@73.448,24.222 U5.hole U8.2 U8.7 U10.3 U10.6 U10.8 U10.9 U10.10 U10.11 U10.12 U10.13 U10.14 U10.24 U10.27 U10.28 X1.A12 X1.A13 X1.A14 X1.A15 X1.A16 X1.A21 X1.A22 X1.A23 X1.A30 X1.B9 X1.B10 X1.B14 X1.B15 X1.B16 X1.B20 X1.B21 X1.B22 X1.CH X1.LH X1.RH

## Polygon pours and split planes (outlines as drawn)
HC_1_OUTPUT on Top Layer "Top Layer-HC_1_OUTPUT" (solid, pour order 40): 100.923,61.957 115.284,61.957 115.284,77.226 103.773,90.726 55.326,90.726 48.926,84.326 42.835,77.226 42.452,76.843 42.452,71.748 42.648,71.552 44.836,71.552 44.836,71.767 55.011,81.726 55.392,81.726 93.262,81.726 94.277,77.226 95.962,72.805 99.106,67.714 100.075,65.005 100.923,64.157
LC_2_OUTPUT on Top Layer "Top Layer-LC_2_OUTPUT" (solid, pour order 70): 150.591,67.714 146.556,67.714 146.556,71.131 146.556,71.226 150.591,71.226
LC_3_OUTPUT on Top Layer "Top Layer-LC_3_OUTPUT" (solid, pour order 68): 140.441,67.714 136.406,67.714 136.406,71.131 136.406,71.226 140.441,71.226
LC_4_OUTPUT on Top Layer "Top Layer-LC_4_OUTPUT" (solid, pour order 66): 131.259,67.714 127.224,67.714 127.224,71.131 127.224,71.226 131.259,71.226
LC_1_OUTPUT on Top Layer "Top Layer-LC_1_OUTPUT" (solid, pour order 60): 121.511,67.714 117.476,67.714 117.476,71.131 117.476,71.226 121.511,71.226
HC_2_OUTPUT on Top Layer "Top Layer-HC_2_OUTPUT" (solid, pour order 38): 87.591,61.918 87.631,61.957 100.923,61.957 100.923,62.826 100.923,64.638 92.948,81.726 55.061,81.726 44.561,71.226 42.961,71.226 42.961,71.552 40.708,73.804 39.667,72.763 39.667,68.579 41.613,66.633 47.314,66.633 56.529,75.848 58.705,74.404 81.248,73.936 86.485,69.96
HC_4_OUTPUT on Top Layer "Top Layer-HC_4_OUTPUT" (solid, pour order 34): 87.105,61.918 74.949,61.918 73.861,63.005 73.861,68.482 58.391,68.482 41.756,51.848 38.301,51.848 38.301,57.54 56.487,75.726 75.691,75.726 77.829,75.726 87.105,70.089
LC_6_OUTPUT on Top Layer "Top Layer-No Net 2" (solid, pour order 54): 145.168,15.48 148.868,15.48 148.868,11.482 146.974,9.588 145.168,9.588 145.168,11.482
LC_7_OUTPUT on Top Layer "Top Layer-LC_7_OUTPUT" (solid, pour order 50): 135.439,15.308 139.139,15.308 139.139,11.31 137.245,9.416 135.439,9.416 135.439,11.31
LC_5_OUTPUT on Top Layer "Top Layer-LC_5_OUTPUT" (solid, pour order 48): 125.683,15.308 129.417,15.308 129.417,11.664 127.169,9.416 125.717,9.416 125.717,10.363
LC_8_OUTPUT on Top Layer "Top Layer-LC_8_OUTPUT" (solid, pour order 46): 116.066,15.558 119.766,15.558 119.766,11.56 119.516,11.31 116.087,11.31 116.087,12.488
no net on Top Layer "Top Layer-No Net 1" (solid, pour order 36): 98.825,67.738
HC_3_OUTPUT on Top Layer "Top Layer-HC_3_OUTPUT" (solid, pour order 32): 73.601,61.918 60.884,61.918 46.721,47.754 43.373,47.754 42.469,48.657 42.561,48.749 42.561,53.058 42.613,53.11 43.22,53.558 44.561,54.743 58.301,68.482 73.601,68.482
NetF1_2 on Top Layer "Top Layer-+12 1" (solid, pour order 30): 52.852,48.788 52.845,35.294 42.561,35.294 39.985,37.871 39.985,46.226 41.719,46.226 43.22,47.727
+12 on Top Layer "Top Layer-+12" (solid, pour order 20): 59.583,51.407 152.116,51.407 152.116,33.407 59.583,33.407
no net on Top Layer "Top Layer-No Net" (solid, pour order 0): 167.315,38.888
no net on Bottom Layer "Bottom Layer-No Net 3" (solid, pour order 62): 131.282,67.714
no net on Bottom Layer "Bottom Layer-No Net" (solid, pour order 16): 73.048,41.263
no net on Bottom Layer "Bottom Layer-No Net 1" (solid, pour order 14): 73.467,37 74,37 73,37
no net on Bottom Layer "Bottom Layer-No Net 2" (solid, pour order 6): 73.815,58.263

## Text inside footprints (layer, text, board x,y; h text height)
D9: Bottom Overlay "*" at 73.219,111.417 h1.52
D10: Bottom Overlay "*" at 66.235,118.385 h1.52 r90
LED1: Top Overlay "*" at 50.763,29.346 h1.52 r90
LED2: Top Overlay "*" at 53.083,97.478 h1.52 r90
X1: Top Overlay "SUPER SEAL 60POS" at 47.335,97.42 h1.52 r270